# EAGLE board Light_Module_v.2 (EAGLE 6.4)
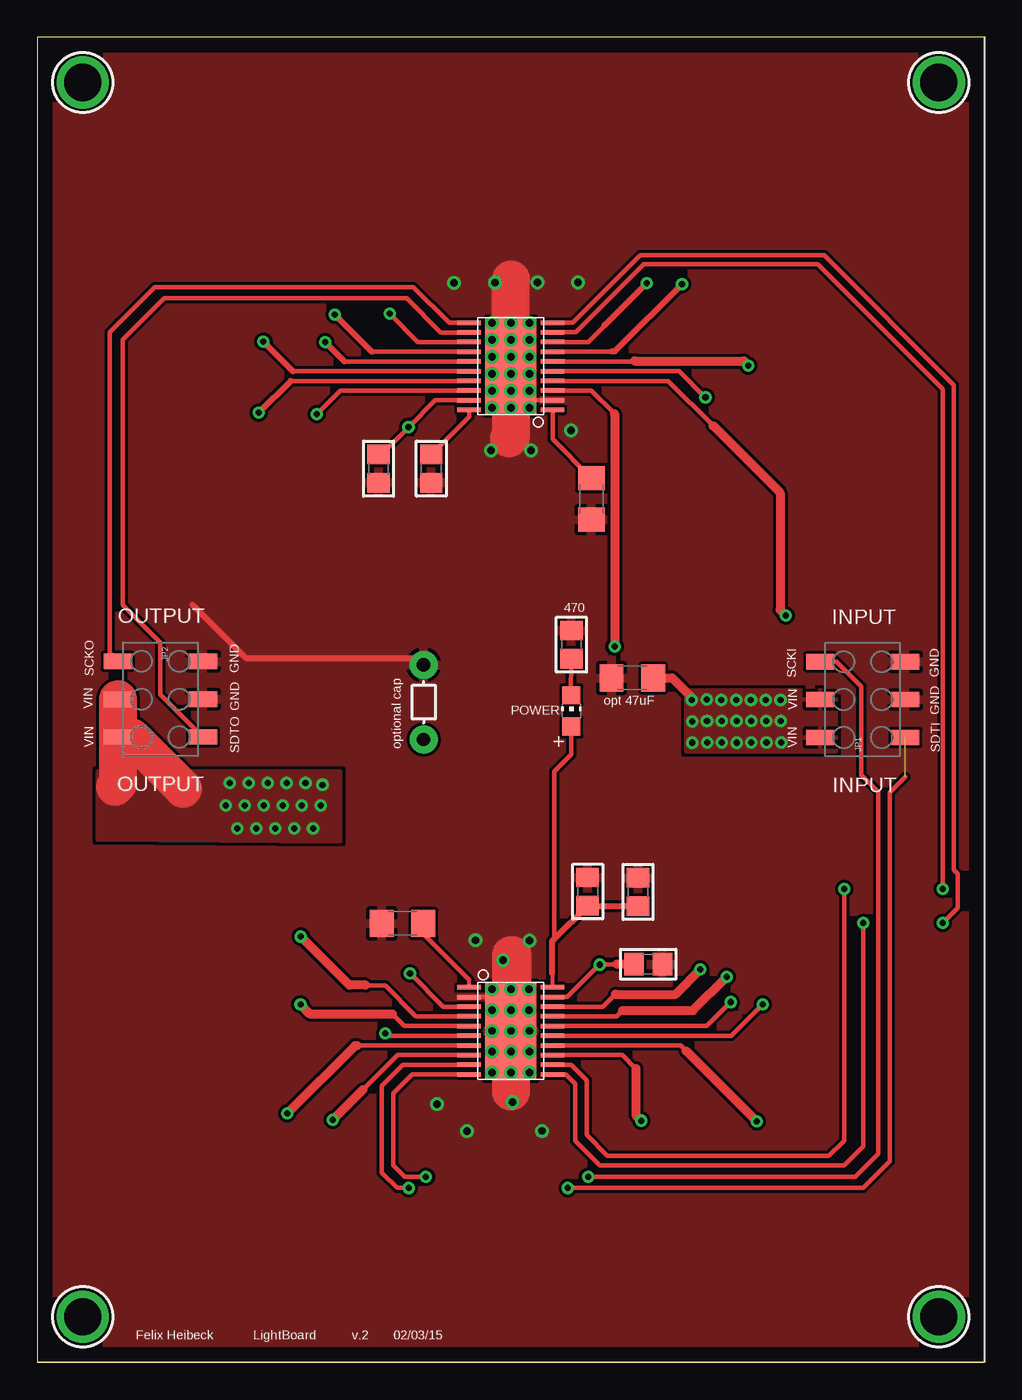
[diagram p0: board, top side]
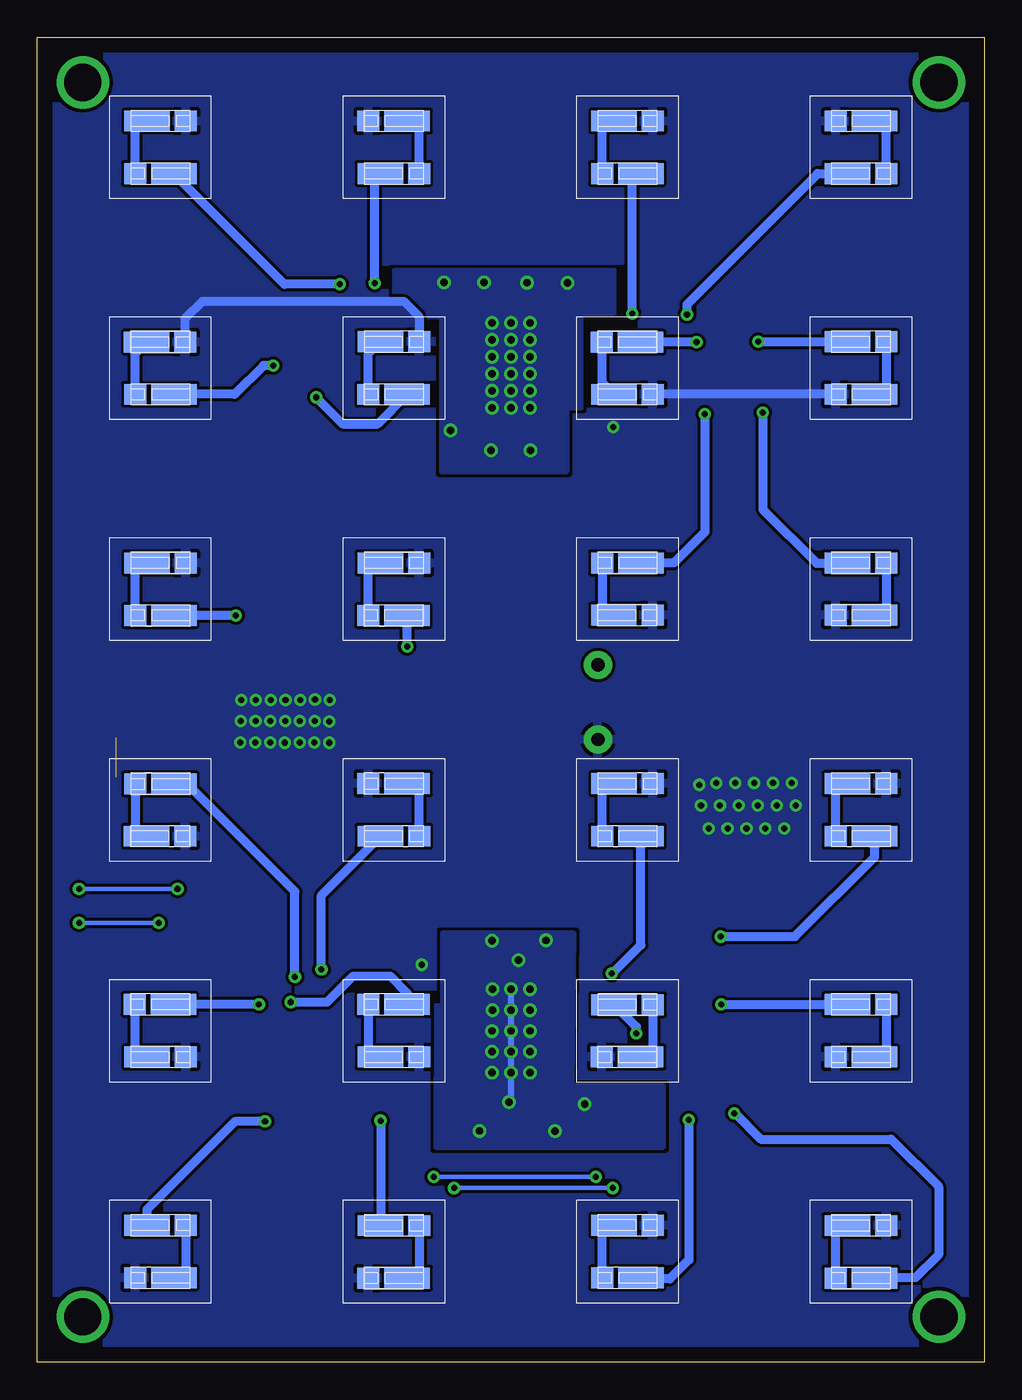
[diagram p1: board, bottom side, seen from below]

Size 63.51 x 88.87 mm. Coordinates in mm from the lower left corner, seen from the top.
Outline: 0,0 63.51,0 63.51,88.88 0,88.88 0,0
Copper layers (1*16): Top 0.035mm / dielectric 1.5mm / Bottom 0.035mm
Design rules "default *": minimum track width 10mil, minimum drill 8mil, track to track 8mil, track to pad 8mil, pad to pad 8mil, via to via 8mil, smd to smd 8mil, copper to edge 40mil, drill to drill 8mil, minimum pad ring 10mil, minimum via ring 8mil, stop-mask expansion 4mil, vias tented up to drill 16mil, thermal gap 10mil

## Footprints (pad centres in the part's own frame; a part is rotated, then mirrored left to right if it is on the bottom)
0805 = smd 1.3 x 1.5: 1 -0.95,0; 2 0.95,0
1206 = smd 1.6 x 1.8: 1 -1.4,0; 2 1.4,0
AXIAL-5MM = drill 0.9 pad 1.88: P$1 -2.5,0; P$2 2.5,0
HTSSOP20DAP = smd 0.3 x 1.55: 1 -2.925,-2.8; 2 -2.275,-2.8; 3 -1.625,-2.8; 4 -0.975,-2.8; 5 -0.325,-2.8; 6 0.325,-2.8; 7 0.975,-2.8; 8 1.625,-2.8; 9 2.275,-2.8; 10 2.925,-2.8; 11 2.925,2.8; 12 2.275,2.8; 13 1.625,2.8; 14 0.975,2.8; 15 0.325,2.8; 16 -0.325,2.8; 17 -0.975,2.8; 18 -1.625,2.8; 19 -2.275,2.8; 20 -2.925,2.8 | smd 6.5 x 3.4: EXP 0,0
2X3_SMD = smd 1.02 x 1.9: 1 -2.54,-2.85; 2 -2.54,2.85; 3 0,-2.85; 4 0,2.85; 5 2.54,-2.85; 6 2.54,2.85
DS205 = smd 1.473 x 1.4: P$1 -1.65,0 | smd 3.048 x 1.4: P$2 0.95,0
CHIP-LED0805 = smd 1.2 x 1.2: A 0,-1.05; C 0,1.05
MOUNTINGHOLE_2.5_PLATED = drill 2.5 pad 3.2: P$1 0,0

## Placement (x,y rotation side)
C1  10uF/16V  [0805]  40.28,31.55 90 top
C2  1uF/50V  [0805]  40.97,26.7 0 top
C3  1uF/50V  [0805]  22.89,59.94 270 top
C4  [1206]  39.9,45.9 180 top
C5  0.1uF  [0805]  36.91,31.57 90 top
C6  0.1uF  [0805]  26.42,59.94 270 top
C7  [AXIAL-5MM]  25.91,44.27 90 top
IC1  TLC59711  [HTSSOP20DAP]  31.75,22.23 270 top
IC2  TLC59711  [HTSSOP20DAP]  31.75,66.8 90 top
JP1  [2X3_SMD]  55.35,44.45 90 top
JP2  [2X3_SMD]  8.26,44.48 270 top
LED1  [DS205]  23.88,38.81 180 bottom
LED2  [DS205]  23.98,35.28 0 bottom
LED3  Green  [CHIP-LED0805]  35.81,43.69 0 top
LED4  [DS205]  8.23,38.81 180 bottom
LED5  [DS205]  8.33,35.28 0 bottom
LED6  [DS205]  8.33,20.47 0 bottom
LED7  [DS205]  8.23,24 180 bottom
LED8  [DS205]  24,20.47 0 bottom
LED9  [DS205]  23.88,23.98 180 bottom
LED10  [DS205]  8.23,9.17 180 bottom
LED11  [DS205]  8.33,5.64 0 bottom
LED12  [DS205]  23.88,9.19 180 bottom
LED13  [DS205]  23.98,5.66 0 bottom
LED14  [DS205]  39.65,5.64 0 bottom
LED15  [DS205]  39.55,9.17 180 bottom
LED16  [DS205]  55.3,5.66 0 bottom
LED17  [DS205]  55.19,9.19 180 bottom
LED18  [DS205]  55.19,20.47 180 bottom
LED19  [DS205]  55.32,24 0 bottom
LED20  [DS205]  39.55,20.47 180 bottom
LED21  [DS205]  39.65,24 0 bottom
LED22  [DS205]  55.22,35.28 180 bottom
LED23  [DS205]  55.3,38.79 0 bottom
LED24  [DS205]  39.65,38.81 0 bottom
LED25  [DS205]  39.55,35.28 180 bottom
LED26  [DS205]  55.19,53.62 180 bottom
LED27  [DS205]  55.3,50.09 0 bottom
LED28  [DS205]  39.55,53.62 180 bottom
LED29  [DS205]  39.67,50.09 0 bottom
LED30  [DS205]  55.22,68.43 180 bottom
LED31  [DS205]  55.3,64.92 0 bottom
LED32  [DS205]  39.55,68.45 180 bottom
LED33  [DS205]  39.65,64.92 0 bottom
LED34  [DS205]  55.19,83.26 180 bottom
LED35  [DS205]  55.3,79.73 0 bottom
LED36  [DS205]  39.65,83.26 0 bottom
LED37  [DS205]  39.55,79.73 180 bottom
LED38  [DS205]  23.88,83.26 180 bottom
LED39  [DS205]  23.98,79.73 0 bottom
LED40  [DS205]  8.33,83.26 0 bottom
LED41  [DS205]  8.23,79.73 180 bottom
LED42  [DS205]  23.88,64.92 180 bottom
LED43  [DS205]  24,68.43 0 bottom
LED44  [DS205]  8.33,64.92 0 bottom
LED45  [DS205]  8.23,68.45 180 bottom
LED46  [DS205]  8.33,50.11 0 bottom
LED47  [DS205]  8.23,53.62 180 bottom
LED48  [DS205]  23.9,50.11 180 bottom
LED49  [DS205]  23.98,53.62 0 bottom
R1  0.9k 1%  [1206]  37.16,57.91 270 top
R2  470  [0805]  35.81,48.13 270 top
R3  0.9k 1%  [1206]  24.49,29.44 180 top
U$1  MOUNTINGHOLE2.5  [MOUNTINGHOLE_2.5_PLATED]  3.05,3.05 0 top
U$2  MOUNTINGHOLE2.5  [MOUNTINGHOLE_2.5_PLATED]  60.45,3.05 0 top
U$3  MOUNTINGHOLE2.5  [MOUNTINGHOLE_2.5_PLATED]  3.05,85.85 0 top
U$4  MOUNTINGHOLE2.5  [MOUNTINGHOLE_2.5_PLATED]  60.45,85.85 0 top

## Library data of the parts
C1-C3 C5 C6 R2 U$1-U$4 = microbuilder
C4 C7 R1 R3 = SparkFun-Passives
IC1 IC2 LED3 = adafruit
JP1 JP2 = SparkFun-Connectors; PROD_ID: CONN-11290
LED1 LED2 LED4-LED49 = digikey

## Nets
1_0: IC1.3 LED2.P$2
1_1: IC1.4 LED5.P$2
1_2: IC1.5 LED7.P$2
1_3: IC1.6 LED9.P$2
1_4: IC1.7 LED11.P$2
1_5: IC1.8 LED13.P$2
1_6: IC1.13 LED15.P$2
1_7: IC1.14 LED17.P$2
1_8: IC1.15 LED19.P$2
1_9: IC1.16 LED21.P$2
1_10: IC1.17 LED23.P$2
1_11: IC1.18 LED25.P$2
2_0: IC2.3 LED29.P$2
2_1: IC2.4 LED27.P$2
2_2: IC2.5 LED33.P$2
2_3: IC2.6 LED31.P$2
2_4: IC2.7 LED35.P$2
2_5: IC2.8 LED37.P$2
2_6: IC2.13 LED39.P$2
2_7: IC2.14 LED41.P$2
2_8: IC2.15 LED43.P$2
2_9: IC2.16 LED45.P$2
2_10: IC2.17 LED47.P$2
2_11: IC2.18 LED49.P$2
3.3V: C1.1 C5.1 IC1.20 LED3.A
+15V: C2.1 C3.1 C4.1 C7.P$1 IC1.19 IC2.19 JP1.2 JP1.4 JP2.3 JP2.5 LED1.P$1 LED4.P$1 LED6.P$1 LED8.P$1 LED10.P$1 LED12.P$1 LED14.P$1 LED16.P$1 LED18.P$1 LED20.P$1 LED22.P$1 LED24.P$1 LED26.P$1 LED28.P$1 LED30.P$1 LED32.P$1 LED34.P$1 LED36.P$1 LED38.P$1 LED40.P$1 LED42.P$1 LED44.P$1 LED46.P$1 LED48.P$1
GND: C1.2 C2.2 C3.2 C4.2 C5.2 C6.2 C7.P$2 IC1.2 IC1.EXP IC2.2 JP1.3 JP1.5 JP2.2 JP2.4 R1.2 R2.1 R3.2
N$1: LED3.C R2.2
N$2: IC1.1 R3.1
N$3: IC2.1 R1.1
N$4: IC1.11 IC2.10
N$5: LED1.P$2 LED2.P$1
N$6: IC1.12 IC2.9
N$7: C6.1 IC2.20
N$9: LED4.P$2 LED5.P$1
N$10: LED6.P$2 LED7.P$1
N$11: LED8.P$2 LED9.P$1
N$12: LED10.P$2 LED11.P$1
N$13: LED12.P$2 LED13.P$1
N$14: LED14.P$2 LED15.P$1
N$15: LED16.P$2 LED17.P$1
N$16: LED18.P$2 LED19.P$1
N$17: LED20.P$2 LED21.P$1
N$18: LED22.P$2 LED23.P$1
N$19: LED24.P$2 LED25.P$1
N$20: LED26.P$2 LED27.P$1
N$21: LED28.P$2 LED29.P$1
N$22: LED30.P$2 LED31.P$1
N$23: LED32.P$2 LED33.P$1
N$24: LED34.P$2 LED35.P$1
N$25: LED36.P$2 LED37.P$1
N$26: LED38.P$2 LED39.P$1
N$27: LED40.P$2 LED41.P$1
N$28: LED42.P$2 LED43.P$1
N$29: LED44.P$2 LED45.P$1
N$30: LED46.P$2 LED47.P$1
N$31: LED48.P$2 LED49.P$1
SCKI: IC1.10 JP1.6
SCKO: IC2.11 JP2.1
SDTI: IC1.9 JP1.1
SDTO: IC2.12 JP2.6

## Tracks (layer width: path | path; a pad name or v marks a point on that pad's centre or on a via)
1_0  (via drill 0.41)
  Top 0.305: IC1.3 27.23,23.85 v24.99,26.09
  Bottom 0.61: v24.99,26.09 24.94,26.09 23.04,27.99 LED2.P$2
1_1  (via drill 0.41)
  Top 0.305: IC1.4 25.39,23.2 23.32,25.27 22.05,25.27 22.02,25.3
  Top 0.61: 22.02,25.3 20.93,25.3 v17.68,28.55
  Bottom 0.61: v17.68,28.55 12.7,28.55 7.37,33.88 7.37,35.27 LED5.P$2
1_2  (via drill 0.41)
  Top 0.305: IC1.5 24.62,22.55 23.82,23.34
  Top 0.61: 23.82,23.34 18.31,23.34 v17.65,24
  Bottom 0.61: v17.65,24 LED7.P$2
1_3  (via drill 0.41)
  Top 0.305: IC1.6 23.49,21.9 v23.34,22.05
  Bottom 0.61: v23.34,22.05 23.34,22.49 LED9.P$2
1_4  (via drill 0.41)
  Top 0.305: IC1.7 21.45,21.25 21.44,21.23
  Top 0.61: 21.44,21.23 21.31,21.23 v16.76,16.69
  Bottom 0.61: v16.76,16.69 16.71,16.69 14.99,14.96 6.25,14.96 3.07,11.79 3.07,7.21 4.62,5.66 7.36,5.66 LED11.P$2
1_5  (via drill 0.41)
  Top 0.305: IC1.8 24.16,20.6 21.84,18.29
  Top 0.61: 21.84,18.29 v19.81,16.26
  Bottom 0.61: v19.81,16.26 19.81,6.86 21.08,5.59 22.95,5.59 LED13.P$2
1_6  (via drill 0.41)
  Top 0.305: IC1.13 39.22,20.6 40.13,19.68
  Top 0.61: 40.13,19.68 40.13,16.56 v40.49,16.2
  Bottom 0.406: 40.49,9.18 LED15.P$2
  Bottom 0.61: v40.49,16.2 40.49,9.18
1_7  (via drill 0.41)
  Top 0.305: IC1.14 43.14,21.25 43.51,20.88
  Top 0.61: 43.51,20.88 v48.23,16.15
  Bottom 0.406: 56.16,9.21 LED17.P$2
  Bottom 0.61: v48.23,16.15 50.24,16.15 56.16,10.24 56.16,9.21
1_8  (via drill 0.41)
  Top 0.305: IC1.15 46.54,21.9 v48.64,24
  Bottom 0.61: v48.64,24 LED19.P$2
1_9  (via drill 0.41)
  Top 0.305: IC1.16 44.9,22.55 v46.51,24.16
  Bottom 0.61: v46.51,24.16 44.07,24.16 42.32,25.91 39.85,25.91 38.68,24.74 38.68,24.02 LED21.P$2
1_10  (via drill 0.41)
  Top 0.305: IC1.17 38.85,23.2 39.24,23.6
  Top 0.61: 39.24,23.6 43.97,23.6 v46.23,25.86
  Bottom 0.61: v46.23,25.86 46.23,31.57 53.44,38.79 LED23.P$2
1_11  (via drill 0.41)
  Top 0.305: IC1.18 37.92,23.85 38.76,24.69
  Top 0.61: 38.76,24.69 42.8,24.69 v44.45,26.34
  Bottom 0.61: v44.45,26.34 44.45,31.33 LED25.P$2
2_0  (via drill 0.41)
  Top 0.305: IC2.3 37.16,65.18 38.71,63.63
  Top 0.61: 38.71,63.63 v38.71,48.01
  Bottom 0.61: v38.71,48.01 38.71,50.07 LED29.P$2
2_1  (via drill 0.41)
  Top 0.305: IC2.4 42.3,65.83 45.31,62.81
  Top 0.61: 45.31,62.81 49.81,58.32 49.81,50.47 v50.19,50.09
  Bottom 0.61: v50.19,50.09 LED27.P$2
2_2  (via drill 0.41)
  Top 0.305: IC2.5 43.05,66.48 v44.81,64.72
  Bottom 0.61: v44.81,64.72 43.03,62.94 40.68,62.94 LED33.P$2
2_3  (via drill 0.41)
  Top 0.305: IC2.6 40,67.13 40.03,67.16
  Top 0.61: 40.03,67.16 47.37,67.16 v47.68,66.85
  Bottom 0.61: v47.68,66.85 48.34,66.85 50.27,64.92 LED31.P$2
2_4  (via drill 0.41)
  Top 0.305: IC2.7 38.47,67.78 38.51,67.82
  Top 0.406: 38.51,67.82 38.73,67.82 v43.23,72.31
  Bottom 0.61: v43.23,72.31 46.93,72.31 LED35.P$2
2_5  (via drill 0.41)
  Top 0.305: IC2.8 36.93,68.43 38.05,69.55
  Top 0.406: 38.05,69.55 38.05,69.57 v40.87,72.39
  Bottom 0.61: v40.87,72.39 40.87,79.36 LED37.P$2
2_6  (via drill 0.41)
  Top 0.305: IC2.13 25.53,68.43 v23.62,70.33
  Bottom 0.61: v23.62,70.33 23.62,79.14 LED39.P$2
2_7  (via drill 0.41)
  Top 0.305: IC2.14 22.44,67.78
  Top 0.406: 22.44,67.78 v19.94,70.28
  Bottom 0.61: v19.94,70.28 19.94,70.97 11.18,79.73 LED41.P$2
2_8  (via drill 0.41)
  Top 0.305: IC2.15 20.61,67.13
  Top 0.406: 20.61,67.13 v19.3,68.43
  Bottom 0.61: v19.3,68.43 LED43.P$2
2_9  (via drill 0.41)
  Top 0.305: IC2.16 17.14,66.48
  Top 0.406: 17.14,66.48 v15.16,68.45
  Bottom 0.61: v15.16,68.45 LED45.P$2
2_10  (via drill 0.41)
  Top 0.305: IC2.17 16.98,65.83
  Top 0.406: 16.98,65.83 v14.86,63.7
  Bottom 0.61: v14.86,63.7 14.86,57.2 11.25,53.59 9.21,53.59 LED47.P$2
2_11  (via drill 0.41)
  Top 0.305: IC2.18 20.32,65.18 v18.75,63.6
  Bottom 0.61: v18.75,63.6 18.75,55.7 20.83,53.62 LED49.P$2
3.3V
  Top 0.254: IC1.20 34.55,26.05 34.52,26.09
  Top 0.305: LED3.A 35.81,40.77 34.67,39.62 34.67,28.39 34.64,28.35
  Top 0.406: 34.52,26.09 34.52,28.23 34.64,28.35 C5.1 40.26,30.62 C1.1
+15V  (via drill 0.41)
  Top 0.305: IC2.19 26.68,64.53 v24.89,62.74 23.05,60.89 C3.1 | 38.89,26.7 38.86,26.67 v37.72,26.67 35.55,24.5 IC1.19
  Top 0.61: C2.1 38.89,26.7 | C4.1 42.57,45.9 43.92,44.55
  Top 2.54: JP2.5 5.41,38.81 5.21,38.61 | JP2.3 JP2.5 | JP2.5 6.33,41.94 9.78,38.48
  Bottom 0.61: LED44.P$1 LED42.P$1 | LED30.P$1 53.57,70.03 52.43,71.17 38.94,71.17 37.9,70.13 LED32.P$1
  other vias: 49.83,44.42 48.84,44.42 47.85,44.42 46.86,44.42 45.87,44.42 44.88,44.45 49.86,43 48.87,43 47.88,43 46.89,43 45.9,43 44.91,43 43.92,42.98 43.89,44.42 49.89,41.58 48.9,41.58 47.88,41.58 46.91,41.55 45.9,41.58 44.93,41.58 43.92,41.55 19.13,38.73 13.41,35.81 14.68,35.81 15.95,35.81 17.22,35.81 19,37.34 12.9,38.86 14.17,38.86 15.44,38.86 16.71,38.86 17.98,38.86 12.65,37.34 13.92,37.34 15.19,37.34 16.46,37.34 17.73,37.34 18.49,35.81
  pour Bottom (rank 2): -1.27,90.42 65.02,90.17 65.02,-3.81 -3.05,-3.56 -3.05,90.42
  pour Top: 53.54,45.06 43.51,45.06 43.51,40.97 53.54,40.97
  pour Top: 4.06,39.62 20.32,39.62 20.32,34.92 4.06,35.05
GND  (via drill 0.5)
  Top 0.305: IC2.2 32.27,64.53 v31.75,64.01 | IC1.2 31.23,24.5 v31.75,25.02
  Top 0.406: v33.02,20.83 v33.02,22.23 IC1.EXP v30.48,22.23 | v33.02,20.83 v31.75,20.83 v30.48,20.83 | v33.02,20.83 33.02,20.7 v31.75,19.43 | v33.02,19.43 v33.02,20.83 | 10.41,50.8 13.97,47.24 25.44,47.24 C7.P$2
  Top 2.54: 31.75,72.64 v31.75,67.44 31.75,62.1 31.62,61.98 | IC1.EXP 31.88,22.23 31.88,27.3 31.75,27.3 31.75,18.16
  Bottom 0.406: v30.48,25.02 30.48,24.89 | 31.62,24.89 v31.75,25.02 31.75,17.65
  other vias: 30.48,23.62 31.75,22.23 33.02,64.01 31.75,65.15 31.75,66.29 31.75,68.58 31.75,69.72 33.02,65.15 33.02,66.29 33.02,67.44 30.48,65.15 30.48,66.29 30.48,67.44 33.02,68.58 33.02,69.72 30.48,68.58 30.48,69.72 30.48,19.43 32.97,25.02 31.75,23.62 32.97,23.62 26.8,17.32 28.8,15.49 31.88,17.45 33.86,15.52 29.39,28.3 31.24,26.97 33.02,28.27 30.48,64.01 27.94,72.39 30.68,72.42 33.55,72.44 36.25,72.44 30.43,61.16 33.1,61.16 35.79,62.51
  pour Bottom: 27.53,28.75 36.32,28.75 36.32,23.88 36.68,23.88 36.68,23.93 36.73,23.93 36.75,14.45 21.54,14.45 21.54,18.52 27.66,18.52 27.66,18.57
  pour Bottom: 24.84,73.2 39.55,73.2 39.55,70.18 36.4,70.18 36.4,59.79 28.02,59.79 28.02,64.06 27.05,64.06 27.05,70.41 24.84,70.41
  pour Top (rank 2): -2.03,90.93 64.26,90.68 64.26,-3.3 -3.81,-3.05 -3.81,90.93
N$1
  Top 0.305: R2.2 35.79,44.77 LED3.C
N$2
  Top 0.254: IC1.1 28.95,25.66
  Top 0.305: R3.1 25.89,28.72 28.95,25.66
N$3
  Top 0.305: IC2.1 34.55,61.92 R1.1
N$4  (via drill 0.41)
  Top 0.305: v60.71,29.46 61.72,30.48 61.72,32.77 61.47,33.02 61.47,65.53 52.76,74.24 40.44,74.24 35.92,69.72 IC2.10 | v55.37,29.46 55.37,14.48 54.1,13.21 37.72,13.21 36.07,14.86 36.07,18.67 35.43,19.3 IC1.11
  Bottom 0.305: v60.71,29.46 v55.37,29.46
N$5
  Bottom 0.61: LED2.P$1 25.63,38.74 25.55,38.81 LED1.P$2
N$6  (via drill 0.41)
  Top 0.305: v54.1,31.75 54.1,14.86 53.09,13.84 38.23,13.84 36.83,15.24 36.83,18.92 35.8,19.95 IC1.12 | v60.71,31.75 60.71,65.28 57.05,68.94 56.9,69.09 52.32,73.66 40.66,73.66 36.09,69.09 IC2.9
  Bottom 0.305: v54.1,31.75 v60.71,31.75
N$7
  Top 0.305: IC2.20 28.95,63.43 C6.1
N$9
  Bottom 0.61: LED5.P$1 9.98,38.56 9.73,38.81 LED4.P$2
N$10
  Bottom 0.61: LED7.P$1 6.58,20.65 6.78,20.45 7.36,20.45 LED6.P$2
N$11
  Bottom 0.61: LED9.P$1 22.23,20.47 22.28,20.42 23,20.42 LED8.P$2
N$12
  Bottom 0.61: LED11.P$1 9.98,9.02 9.88,9.12 9.23,9.12 LED10.P$2
N$13
  Bottom 0.61: LED13.P$1 25.63,9.04 25.48,9.2 LED12.P$2
N$14
  Bottom 0.61: LED15.P$1 37.9,5.84 38.1,5.64 LED14.P$2
N$15
  Bottom 0.61: LED17.P$1 53.54,5.84 53.7,5.69 54.32,5.69 LED16.P$2
N$16
  Bottom 0.61: LED19.P$1 56.97,20.47 LED18.P$2
N$17
  Bottom 0.61: LED21.P$1 41.3,20.52 41.4,20.42 40.55,20.42 LED20.P$2
N$18
  Bottom 0.61: LED23.P$1 56.95,35.36 57,35.31 56.2,35.31 LED22.P$2
N$19
  Bottom 0.61: LED25.P$1 37.9,38.71 38.02,38.84 38.67,38.84 LED24.P$2
N$20
  Bottom 0.61: LED27.P$1 56.95,53.54 56.84,53.65 56.17,53.65 LED26.P$2
N$21
  Bottom 0.61: LED29.P$1 41.33,53.52 41.25,53.59 40.52,53.59 LED28.P$2
N$22
  Bottom 0.61: LED31.P$1 56.95,67.65 LED30.P$2
N$23
  Bottom 0.61: LED33.P$1 41.3,67.65 LED32.P$2
N$24
  Bottom 0.61: LED35.P$1 56.95,83.18 57,83.24 56.17,83.24 LED34.P$2
N$25
  Bottom 0.61: LED37.P$1 37.9,83.11 38.05,83.26 LED36.P$2
N$26
  Bottom 0.61: LED39.P$1 25.63,83.26 25.65,83.29 24.85,83.29 LED38.P$2
N$27
  Bottom 0.61: LED41.P$1 6.58,83.21 6.63,83.26 LED40.P$2
N$28
  Bottom 0.61: LED43.P$1 25.65,65.75 LED42.P$2
N$29
  Bottom 0.61: LED45.P$1 6.58,65.02 6.76,64.85 7.3,64.85 LED44.P$2
N$30
  Bottom 0.61: LED47.P$1 6.58,50.19 6.68,50.09 7.36,50.09 LED46.P$2
N$31
  Bottom 0.61: LED49.P$1 25.63,50.22 25.73,50.11 LED48.P$2
SCKI  (via drill 0.41)
  Top 0.305: IC1.10 25.15,19.3 23.88,18.03 23.88,13.21 24.64,12.45 v26.06,12.45 | v36.93,12.45 54.86,12.45 56.39,13.97 56.39,38.25 55.24,39.4 55.24,45.31 53.57,46.99 JP1.6
  Bottom 0.305: v26.06,12.45 v36.93,12.45
SCKO
  Top 0.305: IC2.11 27.61,69.72 25.22,72.11 7.87,72.11 5.49,69.73 5.46,69.73 5.46,69.7 4.85,69.09 4.85,47.57 JP2.1
SDTI  (via drill 0.41)  (1 unrouted)
  Top 0.305: IC1.9 24.52,19.95 23.11,18.54 23.11,12.7 24.13,11.68 v24.92,11.68 | v35.56,11.68 55.37,11.68 57.15,13.46 57.15,38.23 58.2,39.27
  Bottom 0.305: v24.92,11.68 v35.56,11.68
SDTO
  Top 0.305: IC2.12 27.06,69.08 24.77,71.37 8.51,71.37 5.71,68.58 5.71,50.8 8.26,48.26 8.26,44.78 JP2.6

## Text on the board
tPlace: OUTPUT | 470 | INPUT | opt 47uF | POWER | optional cap | OUTPUT | INPUT | Felix Heibeck | LightBoard | v.2 | 02/03/15
tNames: GND | SCKO | GND | SCKI | GND | VIN | GND | VIN | VIN | SDTO | VIN | SDTI
tValues: 1uF/50V